# Altium PCB PCB_PD85004.PcbDoc
Units mil, origin at the board's own origin, x right, y up, seen from the top; angles counter-clockwise.
Board outline 2412.2 x 1236.1 mil, 2 copper layers (Top Layer, Bottom Layer); 24 components, 12 nets, 137 pads, 1 vias.
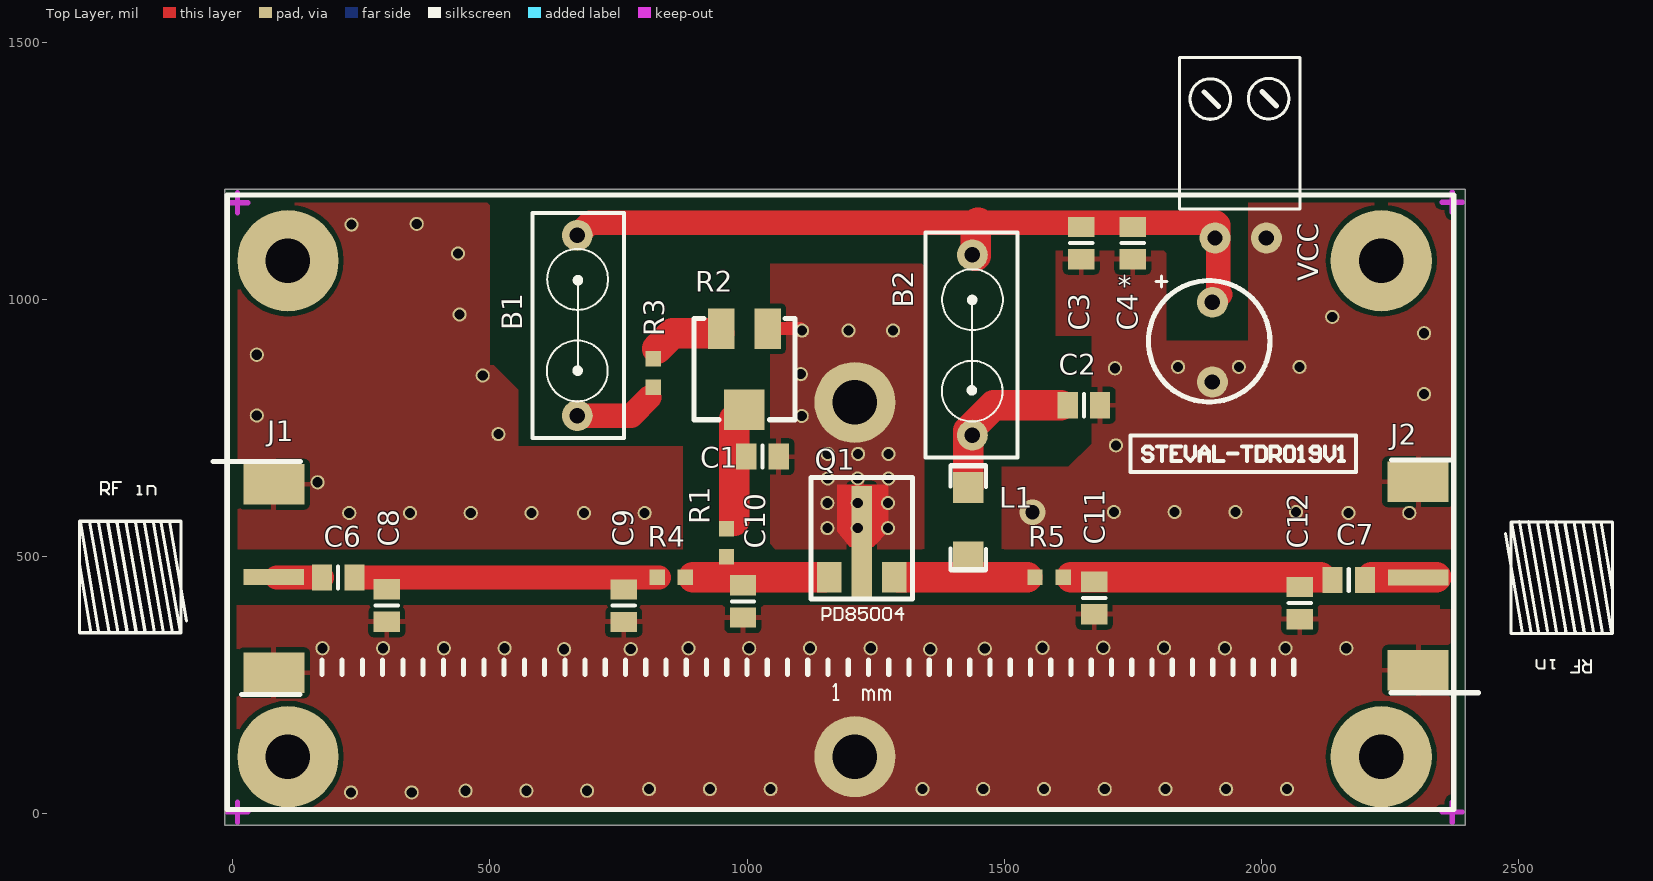
[diagram p0: Top Layer view]
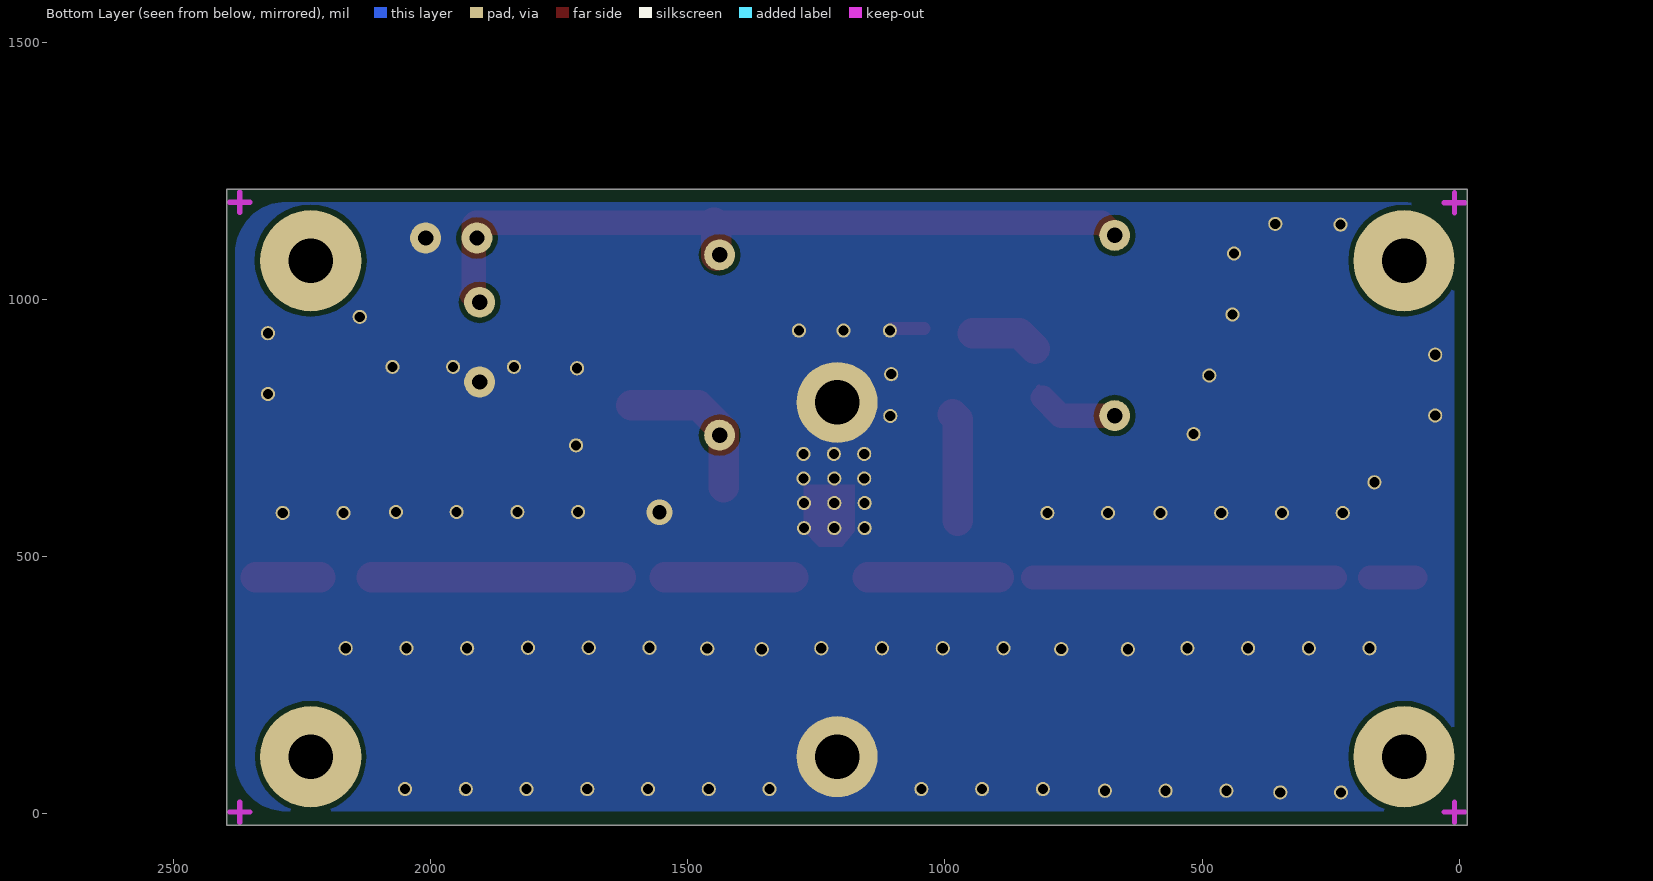
[diagram p1: Bottom Layer view, seen from below]

## Layer stack, top to bottom
Top Solder: solder mask 0.4, Solder Resist, Dk 3.5
Top Layer: signal copper 1.4
Dielectric 1: dielectric 12.6, FR-4, Dk 4.8
Bottom Layer: signal copper 1.4
Bottom Solder: solder mask 0.4, Solder Resist, Dk 3.5

## Board outline
-15.79,-21.46 2396.42,-21.46 2396.42,1214.65 -15.79,1214.65

## Design rules (kind name [scope] priority, off if disabled: settings)
Clearance [All] p1: gap=10 ignorepadtopadclearanceinfootprint=FALSE except(0: Arc-Hole Track-Hole SMDPad-Hole THPad-Hole Via-Hole Fill-Hole Poly-Hole Region-Hole Text-Hole)
PolygonConnect [All] p1: thpad.connectstyle=Direct thpad.reliefconductorwidth=10 thpad.reliefentries=4 thpad.polygonreliefangle="90 Angle" thpad.airgapwidth=10 smdpad.connectstyle=Relief smdpad.reliefconductorwidth=10 smdpad.reliefentries=4 smdpad.polygonreliefangle="90 Angle" smdpad.airgapwidth=10 via.connectstyle=Relief via.reliefconductorwidth=10 via.reliefentries=4 via.polygonreliefangle="90 Angle" via.airgapwidth=10
RoomDefinition PD85004_PP_PA [InComponentClass('PD85004_PP_PA')] p1: confinementstyle=ConfineIn formatcopy=TRUE lockcomponents=FALSE outline -675,-75 2750,-75 2750,1610 -675,1610
RoutingVias [All] p1: holewidth=28 width=50 viastyle="Through Hole" minholewidth=28 minwidth=50 maxholewidth=28 maxwidth=50
SolderMaskExpansion [All] p1: expansion=4
Width [All] p1: maxlimit=78.74 minlimit=10 preferedwidth=10
30 further rules are at their usual default settings.

## Components (designator, comment, footprint, x,y, rotation, side; value= is the part's Value field where it differs from the comment)
* "C5" CP 1905,820 r0 top
B1 "choke" Choke 678.27,1126.69 r180 top
B2 "choke" Choke 1430,735 r0 top
C1 "1u" 6-0805_L 1030,695 r0 top
C2 "1u" 6-0805_L 1655,795 r0 top
C3 "1u" 6-0805_L 1650,1110 r270 top
C4 "1u" 6-0805_L 1750,1110 r270 top
C6 "100n" 6-0805_L 205,460 r0 top
C7 "100n" 6-0805_L 2170,455 r0 top
C8 "100n" 6-0805_L 299.21,405.51 r270 top
C9 "100n" 6-0805_L 760,405 r270 top
C10 "100n" 6-0805_L 992.13,413.39 r270 top
C11 "100n" 6-0805_L 1675,420 r270 top
C12 "100n" 6-0805_L 2075,410 r270 top
J1 "SMA" sma 80,274.84 r0 top
J2 "SMA" sma 2304.84,645.79 r180 top
L1 "L" L 1430,635 r0 top
Q1 "MOSFET_N" pd85004 1160,460 r0 top
R1 "1K" r 961.93,555.12 r180 top
R2 "RPot SM" POT4MM-2 995,865 r270 top
R3 "1K" r 819.57,885.24 r180 top
R4 "0" r 824.88,461.93 r270 top
R5 "0" r 1559.88,461.93 r270 top
VCC "CONN_2" con1 1910,1120 r0 top

## Footprints (in the part's own frame and the unit in brackets; to place one, negate y for a bottom-side part, rotate by r counter-clockwise, add the part's x,y. Pads: shape width x height; smd on the part's side, far side on the other; paste and mask are expansions set on the pad)
6-0805_L [mm] "Chip Resistor, Body 2.0x1.2mm, IPC High Density"
  rect 1x1.3 smd: 1(-0.8,0) 2(0.8,0)
  silkscreen extent 0,-0.55 0,0.55, body extent -1.07,-0.7 1.07,0.7, height 0.7
Choke [mil]
  round 60 hole 30: 1(8.27,352.09) 2(8.27,1.69)
  silkscreen extent -83,-42 96,395
con1 [mil]
  round 60 hole 30: 1(0,0) 2(100,0)
  silkscreen extent -69,56 166,351
CP [mil]
  round 60 hole 30: 1(0,175) 2(0,20)
  silkscreen extent -124,-19 112,226
L [mil]
  rect 60x60 smd mask+4: 1(0,0) 2(0,-135)
pd85004 [mm]
  rect 1.2x1.5 smd mask+0.34: 1(0,0) 3(3.2,0)
  rect 1x5.5 smd mask+0.102: 2(1.6,1.761)
  Top Layer region: 0.381,4.572 0.381,2.286 1.016,1.524 2.159,1.524 2.921,2.286 2.921,4.572
POT4MM-2 [mm] "Square Trimming Potentiometer"
  rect 2x1.3 smd: CCW(-2,-1.15) CW(-2,1.15)
  rect 2x2 smd: W(2,0)
  silkscreen extent -2.5,-2.5 2.5,2.5
r [mil]
  rect 30x30 smd mask+4: 1(1.93,0.12) 2(1.93,55.12)
sma [mm]
  rect 3x0.8 smd mask+0.101: 1(-0.004,4.719)
  rect 3x2 smd mask+0.101: 2(0,0) 2(0,9.307)
  silkscreen extent -9.61,1.95 -4.33,9.41

## Part data
*: library part CP1
C1 C2 C3 C4 C6 C7 C8 C9 C10 C11 C12: library part C
R1 R3 R4 R5: library part R
R2: "Square Trimming Potentiometer", ComponentLink1Description="Manufacturer Link", ComponentLink1URL=http://bourns.com/2/search.html, DatasheetVersion=Oct-2003, PackageDescription="Square Trimming Potentiometer", PackageReference=POT4MM-2, Published=17-Dec-2003, Publisher="Altium Limited"

## Free pads (board coordinates)
  round 27.56 hole 19.68 mask+4: 1(46.69,774.84) 1(46.69,892.95) 1(165,645) 1(174.29,322.32) 1(226.5,585.31) 1(229.8,42.09) 1(230.98,1145.94) 1(292.4,322.32) 1(344.61,585.31) 1(347.91,42.09) 1(357.68,1147.56) 1(410.51,322.32) 1(437.83,1089.8) 1(441.06,971.14) 1(452.8,45.28) 1(462.72,585.31) 1(485.98,852.76) 1(516.42,738.62) 1(528.62,322.32) 1(570.91,45.28) 1(580.83,585.31) 1(644.41,320.31) 1(682.83,585.31) 1(689.02,45.28) 1(773.82,320.55) 1(800.94,585.31) 1(809.65,48.43) 1(886.1,322.32) 1(927.76,48.43) 1(1004.21,322.32) 1(1045.87,48.43) 1(1104.49,855.24) 1(1106.3,774.02) 1(1107.17,939.96) 1(1122.32,322.32) 1(1156.1,555.87) 1(1156.1,604.57) 1(1157.01,652.36) 1(1157.01,700.2) 1(1197.17,939.96) 1(1215.16,555.87) 1(1215.16,604.57) 1(1215.16,652.4) 1(1216.06,700.2) 1(1240.43,322.32) 1(1274.21,555.87) 1(1274.21,604.57) 1(1275.12,652.36) 1(1275.12,700.2) 1(1283.98,939.96) 1(1341.14,48.43) 1(1356.22,320.31) 1(1459.25,48.43) 1(1462.2,321.46) 1(1574.49,323.23) 1(1577.36,48.43) 1(1692.6,323.23) 1(1695.47,48.43) 1(1713.31,587.24) 1(1715.31,866.77) 1(1717.24,716.77) 1(1810.71,323.23) 1(1813.58,48.43) 1(1831.42,587.24) 1(1838.19,869.45) 1(1929.06,322.32) 1(1931.69,48.43) 1(1949.53,587.24) 1(1956.3,869.45) 1(2047.17,322.32) 1(2049.8,48.43) 1(2067.64,587.24) 1(2074.41,869.45) 1(2137.95,966.61) 1(2165.28,322.32) 1(2169.65,585.47) 1(2287.76,585.47) 1(2316.54,816.81) 1(2316.54,934.92)
  round 196.85 hole 86.61 mask+4: 1(107.32,111.34) 1(107.32,1075.91) 1(2233.31,111.34) 1(2233.31,1075.91)
  round 157.48 hole 86.61 mask+4: 1(1209.69,111.34) 1(1209.69,800.31)

## Via types
v1: diameter 50, hole 28, Top Layer to Bottom Layer, 1 vias

## Nets (pads, with @x,y where several pads share a name; then routed paths per layer and width w, separated by ;. In a path a pad name is that pad's centre, name@x,y a point inside that pad or via, vN(x,y) a via of type N, cw(c..) or ccw(c..) an arc to the next point about the centre after c; other vN are vias at no path point)
12V: *.1 B1.2 B2.1 C3.1 C4.1 VCC.1 | length 1462.6
  Top Layer w47.24: B1.2 694.59,1149.59 700.32,1149.59 1449.98,1149.72 ; 1450,1149.72 1650,1149.75 1750,1149.77 1909.99,1149.8 1912.32,1149.8 1916.16,1145.95 1916.16,1013.84 *.1@1920,1010
  Top Layer w59.06: B2.1@1445,1085.39 1445,1144.72 cw(c1450,1144.72) 1449.98,1149.72
GND: *.2 C1.2 C2.2 C3.2 C4.2 C8.2 C9.2 C10.2 C11.2 C12.2 J1.2 J2.2 pad.1@46.69,774.84 pad.1@46.69,892.95 pad.1@165,645 pad.1@174.29,322.32 pad.1@226.5,585.31 pad.1@229.8,42.09 pad.1@230.98,1145.94 pad.1@292.4,322.32 pad.1@344.61,585.31 pad.1@347.91,42.09 pad.1@357.68,1147.56 pad.1@410.51,322.32 pad.1@437.83,1089.8 pad.1@441.06,971.14 pad.1@452.8,45.28 pad.1@462.72,585.31 pad.1@485.98,852.76 pad.1@516.42,738.62 pad.1@528.62,322.32 pad.1@570.91,45.28 pad.1@580.83,585.31 pad.1@644.41,320.31 pad.1@682.83,585.31 pad.1@689.02,45.28 pad.1@773.82,320.55 pad.1@800.94,585.31 pad.1@809.65,48.43 pad.1@886.1,322.32 pad.1@927.76,48.43 pad.1@1004.21,322.32 pad.1@1045.87,48.43 pad.1@1104.49,855.24 pad.1@1106.3,774.02 pad.1@1107.17,939.96 pad.1@1122.32,322.32 pad.1@1156.1,555.87 pad.1@1156.1,604.57 pad.1@1157.01,652.36 pad.1@1157.01,700.2 pad.1@1197.17,939.96 pad.1@1209.69,111.34 pad.1@1209.69,800.31 pad.1@1215.16,555.87 pad.1@1215.16,604.57 pad.1@1215.16,652.4 pad.1@1216.06,700.2 pad.1@1240.43,322.32 pad.1@1274.21,555.87 pad.1@1274.21,604.57 pad.1@1275.12,652.36 pad.1@1275.12,700.2 pad.1@1283.98,939.96 pad.1@1341.14,48.43 pad.1@1356.22,320.31 pad.1@1459.25,48.43 pad.1@1462.2,321.46 pad.1@1574.49,323.23 pad.1@1577.36,48.43 pad.1@1692.6,323.23 pad.1@1695.47,48.43 pad.1@1713.31,587.24 pad.1@1715.31,866.77 pad.1@1717.24,716.77 pad.1@1810.71,323.23 pad.1@1813.58,48.43 pad.1@1831.42,587.24 pad.1@1838.19,869.45 pad.1@1929.06,322.32 pad.1@1931.69,48.43 pad.1@1949.53,587.24 pad.1@1956.3,869.45 pad.1@2047.17,322.32 pad.1@2049.8,48.43 pad.1@2067.64,587.24 pad.1@2074.41,869.45 pad.1@2137.95,966.61 pad.1@2165.28,322.32 pad.1@2169.65,585.47 pad.1@2287.76,585.47 pad.1@2316.54,816.81 pad.1@2316.54,934.92 Q1.2 R2.CW VCC.2 | length 95.1
  Top Layer w25: R2.CW 1103.39,943.74 pad.1@1107.17,939.96
  Top Layer w59.06: pad.1@1209.69,800.31 pad.1@1209.69,826.95
  other v1: 1555.12,586.61
in: C6.1 J1.1 | length 87.9
  Top Layer w47.24: J1.1@85.63,460 C6.1
NetB1_1: B1.1 R3.2 | length 161.2
  Top Layer w10: R3.2@817.64,823.54 R3.2
  Top Layer w47.24: B1.1 774.61,774.61 810,810
NetB2_2: B2.2 C2.1 L1.1 | length 310.9
  Top Layer w59.06: L1.1 1430,745 1480,795 C2.1@1610.24,795
NetC6_2: C6.2 C8.1 C9.1 R4.1 | length 586.9
  Top Layer w47.24: C6.2@242.09,460 R4.1 R4.1@828.94,460
NetC7_1: C7.1 C11.1 C12.1 R5.2 | length 485
  Top Layer w59.06: 1630,460 2115,460
NetC10_1: C10.1 Q1.1 R1.2 R4.2 | length 255
  Top Layer w59.06: 895,460 992.13,460 Q1.1@1150,460
NetL1_2: L1.2 Q1.3 R5.1 | length 250
  Top Layer w59.06: Q1.3@1295,460 1545,460
NetR2_CCW: R2.CCW R3.1 | length 133.2
  Top Layer w59.06: 825,905 855,935 R2.CCW@945.79,935
out: C7.2 J2.1 | length 125
  Top Layer w59.06: C7.2@2215,460 J2.1 J2.1@2340,460
VG1: C1.1 R1.1 R2.W | length 211.5
  Top Layer w59.06: 975,570 975,767.8 R2.W@984.72,777.52

## Polygon pours and split planes (outlines as drawn)
GND on Top Layer "GND_L01_P000" (solid, pour order 0): 7.87,406.38 7.87,8.86 2367.05,8.86 2367.05,398.41 2347.36,398.41 2347.36,406.38
GND on Top Layer "GND_L01_P001" (solid, pour order 1): 9.21,1188.62 9.21,515 2375,515 2375,1188.62
GND on Bottom Layer "GND_L02_P006" (solid, pour order 6): 110,5 cw(c110,105) 10,105 10,1090 cw(c110,1090) 110,1190 2280,1190 cw(c2280,1090) 2380,1090 2380,105 cw(c2280,105) 2280,5

## Keep-outs
Keep-Out Layer:
  lines w10: -10.79,3.54 29.21,3.54 ; -10.79,1188.62 29.21,1188.62 ; 9.21,-16.46 9.21,23.54 ; 9.21,1168.62 9.21,1208.62 ; 2351.42,3.54 2391.42,3.54 ; 2351.42,1189.65 2391.42,1189.65 ; 2371.42,-16.46 2371.42,23.54 ; 2371.42,1169.65 2371.42,1209.65

## Other copper
Top Layer:
  pour cut-out: 495,1188.62 499.45,1184.17 499.45,872.92 507.08,872.92 555,825 555,715 875,715 875,511.81 1058.19,511.81 1045,525 1045,1070 1340,1070 1345,1065 1345,515.75 1484.25,515.75 1495,515.75 1495,530 1495,675 1625,675 1670,720 1670,930 1600,930 1600,1095 1810,1095 1815,1090 1815,920 1975,920 1975,1195 500,1195

## Silkscreen, mask and mechanical layers (free items; w line width, h text height)
Top Overlay:
  drawing of 225 lines, arcs and shapes, not listed